# Altium PCB lp_ecg(1).PcbDoc
Units mm, origin at the board's own origin, x right, y up, seen from the top; angles counter-clockwise.
Board outline 32.2 x 20.48 mm, 2 copper layers (F.Cu, B.Cu); 60 components, 74 nets, 247 pads, 31 vias.
Unrouted connection lines stored in the file: 4.
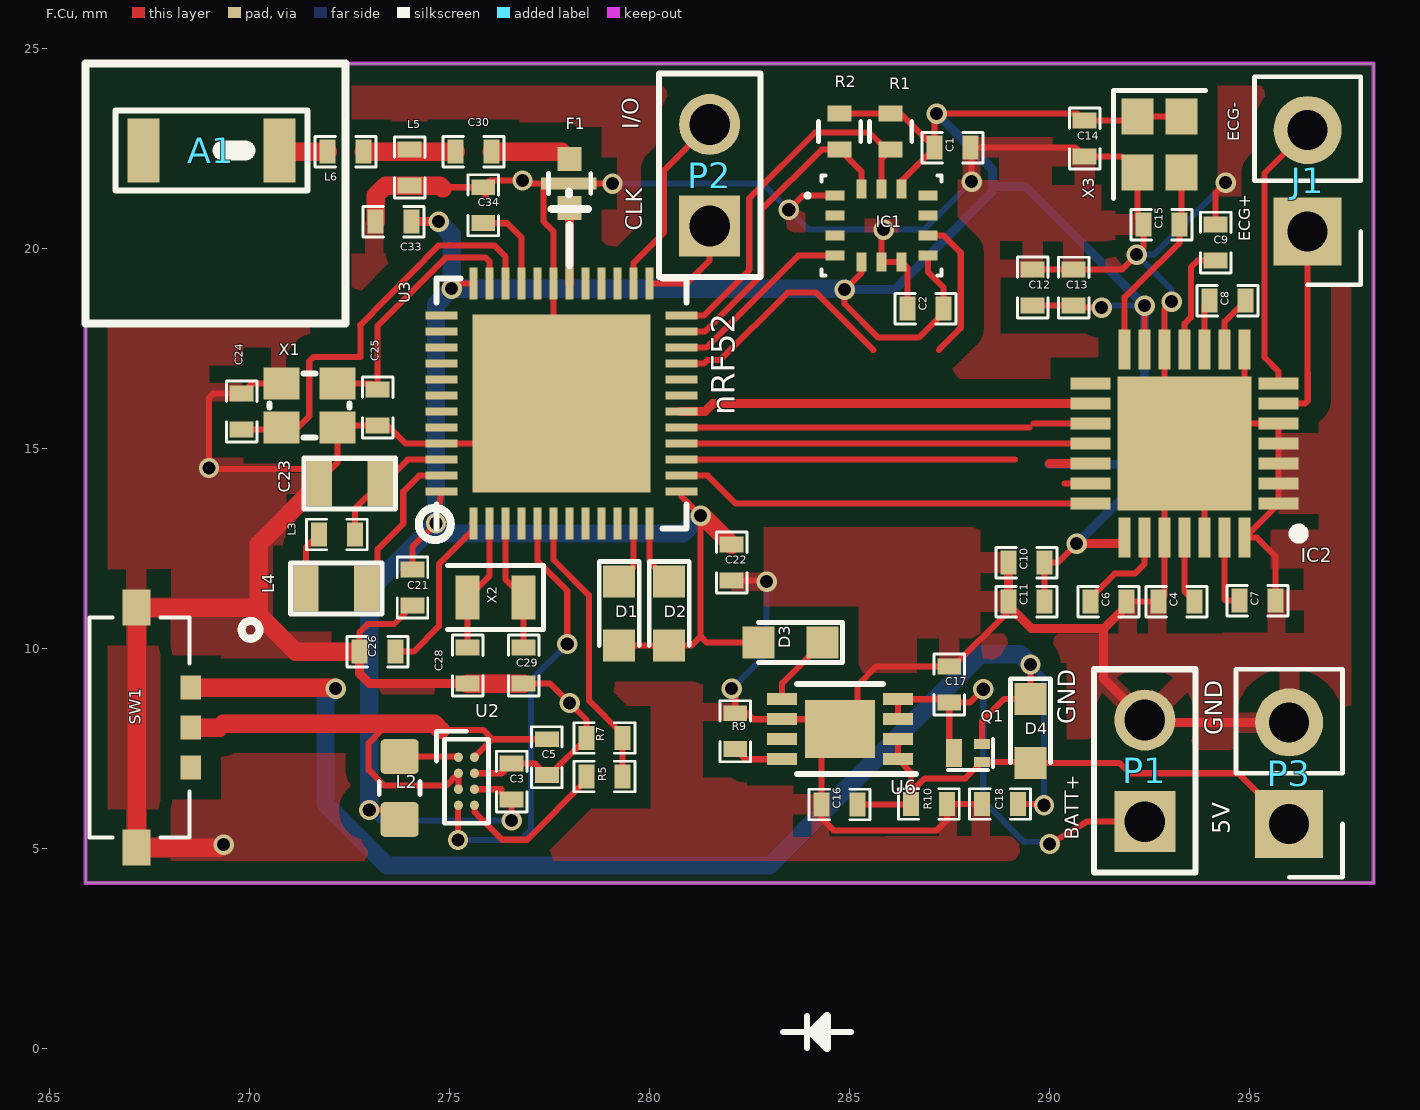
[diagram p0: F.Cu view]
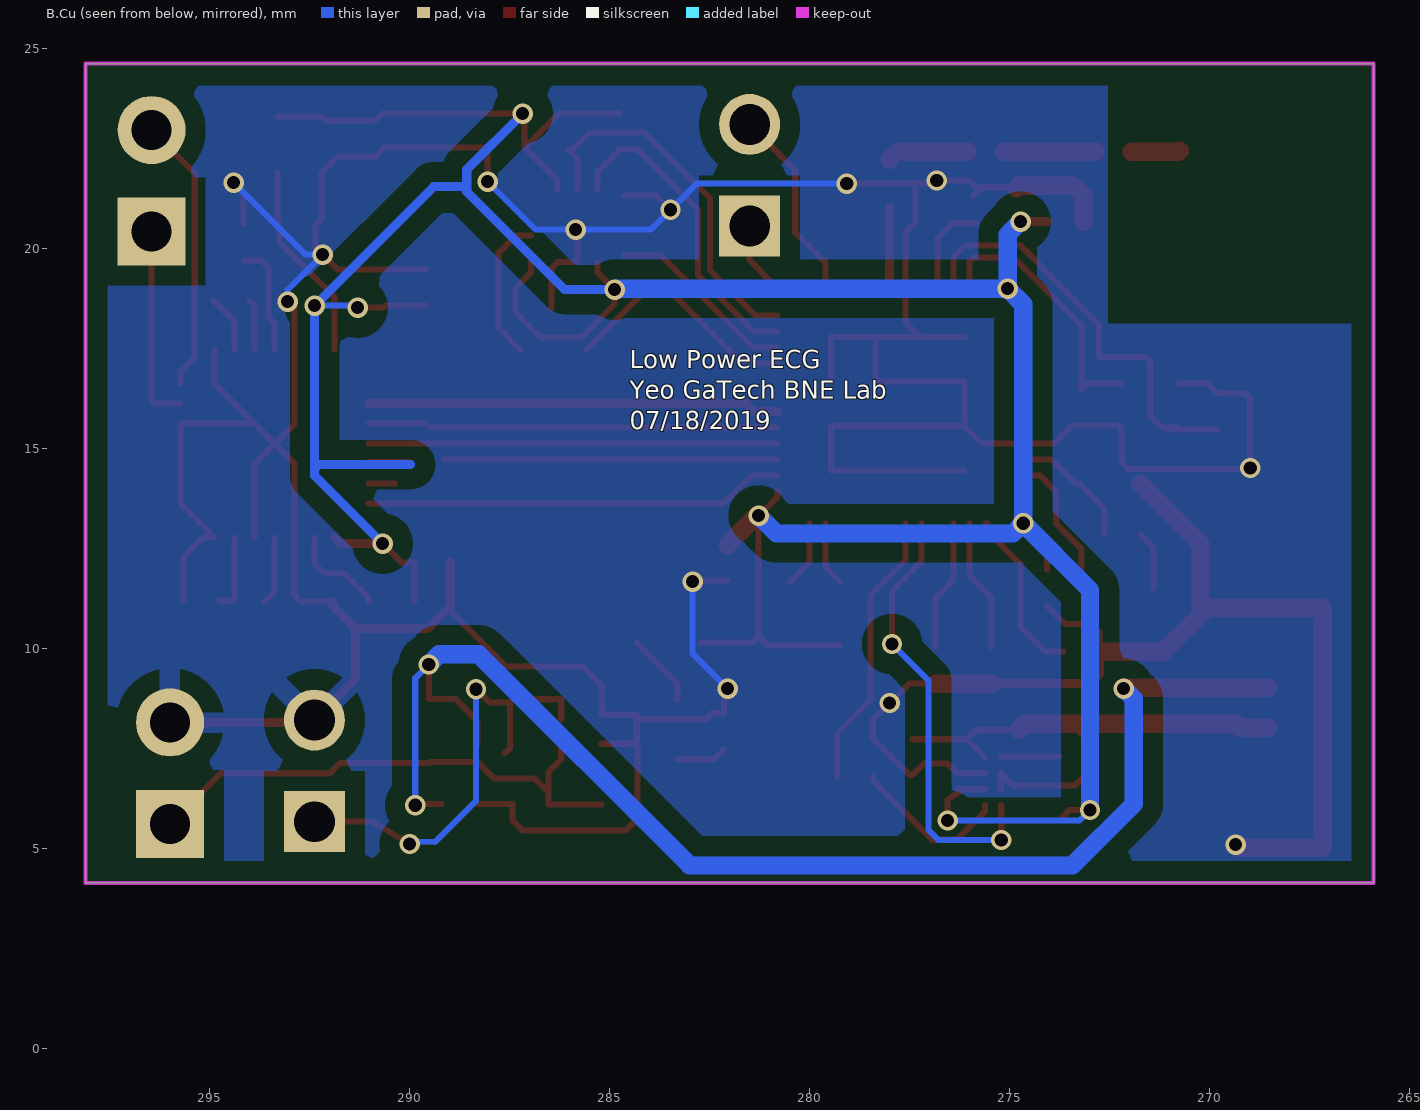
[diagram p1: B.Cu view, seen from below]

## Layer stack, top to bottom
F.Mask: solder mask 0.0102, Solder Resist, Dk 3.5
F.Cu: signal copper 0.0356
Dielectric 1: dielectric 0.32, FR-4, Dk 4.8
B.Cu: signal copper 0.0356
B.Mask: solder mask 0.0102, Solder Resist, Dk 3.5

## Board outline
265.9,4.132 298.1,4.132 298.1,24.612 265.9,24.612 265.9,24.592 265.9,4.132

## Design rules (kind name [scope] priority, off if disabled: settings)
Clearance "Clearence 0.508_Polygon" [InNamedPolygon('F.Cu-DGND') OR InNamedPolygon('B.Cu-DGND')] p1: gap=0.508 ignorepadtopadclearanceinfootprint=FALSE
Clearance "Clearence 0.1524_NetClass" [InNetClass('Default')] p2: gap=0.152 ignorepadtopadclearanceinfootprint=FALSE
HoleSize "Hole Size (Default)" [All] p1: absolutevalues=TRUE maxlimit=10 minlimit=0 maxpercent=80.000 minpercent=20.000
MinimumSolderMaskSliver [All] p1: minsoldermaskwidth=0
PolygonConnect Polygon_B.Cu-DGND_ConnectDirect [IsNamedPolygon('B.Cu-DGND') vs IsVia] p1: connectstyle=Direct reliefconductorwidth=0.254 reliefentries=4 polygonreliefangle="90 Angle" airgapwidth=0.254
PolygonConnect Polygon_B.Cu-DGND_ConnectRelief45 [IsNamedPolygon('B.Cu-DGND') vs (IsThruPin or IsSMTPin) and (PadShape_AllLayers = 'Round')] p2: connectstyle=Relief reliefconductorwidth=0.508 reliefentries=4 polygonreliefangle="45 Angle" airgapwidth=0.508
PolygonConnect Polygon_B.Cu-DGND_ConnectRelief90 [IsNamedPolygon('B.Cu-DGND') vs (IsThruPin or IsSMTPin) and (PadShape_AllLayers <> 'Round')] p3: connectstyle=Relief reliefconductorwidth=0.508 reliefentries=4 polygonreliefangle="90 Angle" airgapwidth=0.508
PolygonConnect Polygon_F.Cu-DGND_ConnectDirect [IsNamedPolygon('F.Cu-DGND') vs IsVia] p4: connectstyle=Direct reliefconductorwidth=0.254 reliefentries=4 polygonreliefangle="90 Angle" airgapwidth=0.254
PolygonConnect Polygon_F.Cu-DGND_ConnectRelief45 [IsNamedPolygon('F.Cu-DGND') vs (IsThruPin or IsSMTPin) and (PadShape_AllLayers = 'Round')] p5: connectstyle=Relief reliefconductorwidth=0.508 reliefentries=4 polygonreliefangle="45 Angle" airgapwidth=0.508
PolygonConnect Polygon_F.Cu-DGND_ConnectRelief90 [IsNamedPolygon('F.Cu-DGND') vs (IsThruPin or IsSMTPin) and (PadShape_AllLayers <> 'Round')] p6: connectstyle=Relief reliefconductorwidth=0.508 reliefentries=4 polygonreliefangle="90 Angle" airgapwidth=0.508
RoutingVias [All] p1: holewidth=0.711 width=1.27 viastyle="Through Hole" minholewidth=0.711 minwidth=1.27 maxholewidth=0.711 maxwidth=1.27
SilkToSilkClearance [All] p1: silktosilkclearance=0
SilkToSolderMaskClearance [IsPad] p1: minsilkscreentomaskgap=0 clearancetoexposedcopper=TRUE
SolderMaskExpansion [All] p1: expansion=0.102 istentingtop=FALSE
Width [All] p1: maxlimit=10 minlimit=0.05 preferedwidth=0.457 minimp=50.000000 maximp=50.000000 favimp=50.000000
26 further rules are at their usual default settings.

## Classes and differential pairs
net class Default: 1.8V 5V_in_charge AIN_BAT_DIV_VOLTAGE BATT_IN BMI_INT1 BMI_INT2 BMI_SCL BMI_SDA DEC1 DEC2 DEC3 DGND LED2 LED3 LOAD_SW_CTRL MAX30003_CSB MAX30003_FCLK MAX30003_INT MAX30003_INT2 MAX30003_SCLK MAX30003_SDI MAX30003_SDO Net-(A1-Pad1) Net-(A1-Pad2) Net-(C4-Pad2) Net-(C6-Pad1) Net-(C7-Pad1) Net-(C8-Pad1) Net-(C8-Pad2) Net-(C9-Pad1) Net-(C23-Pad1) Net-(C24-Pad2) Net-(C25-Pad2) Net-(C28-Pad1) Net-(C29-Pad1) Net-(C30-Pad2) Net-(D3-Pad1) Net-(F1-Pad2) Net-(IC1-Pad2) Net-(IC1-Pad3) Net-(IC1-Pad10) Net-(IC1-Pad11) Net-(IC2-Pad6) Net-(IC2-Pad7) Net-(L2-Pad1) Net-(L3-Pad1) Net-(L4-Pad1) Net-(R5-Pad1) Net-(R9-Pad1) Net-(SW1-Pad2) Net-(U3-Pad4) Net-(U3-Pad7) Net-(U3-Pad8) Net-(U3-Pad9) Net-(U3-Pad10) Net-(U3-Pad20) Net-(U3-Pad27) Net-(U3-Pad28) Net-(U3-Pad29) Net-(U3-Pad37) Net-(U3-Pad38) Net-(U3-Pad39) Net-(U3-Pad40) Net-(U3-Pad41) Net-(U3-Pad42) Net-(U3-Pad43) Net-(U3-Pad44) Net-(U6-Pad7) RF SWDCLK SWDIO VCC VccSwitch

## Components (designator, comment, footprint, x,y, rotation, side; value= is the part's Value field where it differs from the comment)
A1 "CHIP-ANT" JTI-2450AT18A100-CHIP-ANT 269.045,22.439 r180 top
C1 "100nF" SM0402 287.575,22.513 r0 top
C2 "100nF" SM0402 286.9,18.487 r180 top
C3 "10uF" SM0402 276.55,6.662 r90 top
C4 "10uF" SM0402 293.175,11.162 r0 top
C5 "10uF" SM0402 277.43,7.273 r270 top
C6 "10uF" SM0402 291.475,11.162 r0 top
C7 "1uF" SM0402 295.2,11.187 r0 top
C8 "1uF" SM0402 294.45,18.687 r0 top
C9 "1uF" SM0402 294.15,20.137 r90 top
C10 "0.1uF" SM0402 289.425,12.138 r0 top
C11 "10uF" SM0402 289.425,11.162 r180 top
C12 "0.1uF" SM0402 289.575,19.013 r90 top
C13 "10uF" SM0402 290.6,19.012 r270 top
C14 "0.1uF" SM0402 290.875,22.738 r270 top
C15 "15pF" SM0402 292.8,20.588 r180 top
C16 "4.7uF" SM0402 284.75,6.092 r180 top
C17 "4.7uF" SM0402 287.49,9.092 r90 top
C18 "1.0uF" SM0402 288.76,6.102 r0 top
C21 "4.7µF" SM0402 274.07,11.512 r90 top
C22 "100nF" SM0402 282.05,12.137 r270 top
C23 "1.0µF" SM0603 272.5,14.112 r180 top
C24 "12pF" SM0402 269.8,15.912 r270 top
C25 "12pF" SM0402 273.2,16.012 r90 top
C26 "100nF" SM0402 273.2,9.912 r180 top
C28 "12pF" SM0402 275.45,9.562 r270 top
C29 "12pF" SM0402 276.85,9.562 r270 top
C30 "1.0pF" SM0402 275.6,22.412 r180 top
C33 "100nF" SM0402 273.6,20.662 r0 top
C34 "100pF" SM0402 275.84,21.072 r90 top
D1 "Comment" LED_0603 279.24,10.862 r270 top
D2 "Comment" LED_0603 280.49,10.862 r270 top
D3 "Comment" LED_0603 283.525,10.137 r180 top
D4 "Comment" LED_0603 289.52,7.932 r270 top
F1 "Comment" R_0402#1 278,21.612 r90 top
IC1 "BMI160" BMI160 285.8,20.562 r0 top
IC2 "MAX30003CTI+" QFN50P500X500X80-29N 293.375,15.112 r180 top
J1 "Comment" Pin_Header_Straight_1x02_Pitch2.54mm 296.45,20.412 r180 top
L2 "Comment" L_0603_1608Metric 273.75,6.502 r270 top
L3 "15nH" SM0402 272.18,12.842 r0 top
L4 "10uH" SM0603 272.17,11.492 r180 top
L5 "2.7nH" SM0402 274,22.012 r270 top
L6 "3.9nH" SM0402 272.4,22.412 r180 top
P1 "CONN_2" PIN_ARRAY_2X1 292.38,6.932 r90 top
P2 "CONN_2" PIN_ARRAY_2X1 281.5,21.822 r90 top
P3 "Comment" Pin_Header_Straight_1x02_Pitch2.54mm 295.99,5.602 r180 top
Q1 "Comment" X2-DFN1006 287.96,7.382 r180 top
R1 "Comment" R_0402#2 286.025,22.912 r270 top
R2 "Comment" R_0402#2 284.75,22.912 r270 top
R5 "1M" SM0402 278.87,6.792 r0 top
R7 "1M" SM0402 278.87,7.752 r0 top
R9 "2k" SM0402 282.14,7.922 r90 top
R10 "100k" SM0402 286.98,6.102 r0 top
SW1 "SSAJ120100" SSAJ120100 268.53,9.012 r270 top
U2 "Comment" Texas_DSBGA-8_0.9x1.9mm_Layout2x4_P0.5mm 275.42,6.672 r0 top
U3 "Comment" UQFN-48-1EP_6x6mm_Pitch0.4mm 277.8,16.112 r90 top
U6 "Comment" DFN-8-1EP_3x2mm_Pitch0.5mm 284.76,7.972 r180 top
X1 "Crystal_GND24" CRYSTAL-SMD-2.0MMx1.6MM 271.5,16.062 r0 top
X2 "Comment" Crystal_SMD_2012-2pin_2.0x1.2mm 276.15,11.262 r180 top
X3 "Comment" Crystal_SMD_2016-4pin_2.0x1.6mm 292.75,22.587 r270 top

## Footprints (in the part's own frame and the unit in brackets; to place one, negate y for a bottom-side part, rotate by r counter-clockwise, add the part's x,y. Pads: shape width x height; smd on the part's side, far side on the other; paste and mask are expansions set on the pad)
BMI160 [mm]
  rect 0.475x0.25 smd mask+0.015: 1(-1.162,0.75) 2(-1.162,0.25) 3(-1.162,-0.25) 4(-1.162,-0.75) 8(1.162,-0.75) 9(1.162,-0.25) 10(1.162,0.25) 11(1.162,0.75)
  rect 0.25x0.475 smd mask+0.015: 5(-0.5,-0.912) 6(0,-0.912) 7(0.5,-0.912) 12(0.5,0.912) 13(0,0.912) 14(-0.5,0.912)
  silkscreen extent -1.9,-1.25 1.5,1.25
CRYSTAL-SMD-2.0MMx1.6MM [mm]
  rect 0.9x0.8 smd mask+0.015: 1(-0.7,-0.55) 2(0.7,-0.55) 3(0.7,0.55) 4(-0.7,0.55)
  silkscreen extent -1,-0.8 1,0.8
Crystal_SMD_2012-2pin_2.0x1.2mm [mm]
  rect 0.6x1.1 smd mask+0.015: 1(-0.7,0) 2(0.7,0)
  silkscreen extent -1.2,-0.8 1.2,0.8
Crystal_SMD_2016-4pin_2.0x1.6mm [mm]
  rect 0.9x0.8 smd mask+0.015: 1(-0.7,-0.55) 2(0.7,-0.55) 3(0.7,0.55) 4(-0.7,0.55)
  silkscreen extent -1.35,-1.15 1.35,1.15
DFN-8-1EP_3x2mm_Pitch0.5mm [mm]
  rect 0.75x0.3 smd mask+0.015: 1(-1.45,0.75) 2(-1.45,0.25) 3(-1.45,-0.25) 4(-1.45,-0.75) 5(1.45,-0.75) 6(1.45,-0.25) 7(1.45,0.25) 8(1.45,0.75)
  rect 0.875x0.725 smd mask+0.015: 9(-0.437,-0.363) 9(-0.437,0.363) 9(0.437,-0.363) 9(0.437,0.363)
  silkscreen extent -1.9,-1.12 1.07,1.12
JTI-2450AT18A100-CHIP-ANT [mm]
  rect 0.8x1.6 smd mask+0.015: 1(-1.7,0) 2(1.7,0)
  silkscreen extent -2.4,-1 2.4,1
L_0603_1608Metric [mm]
  rrect25% 0.875x0.95 smd mask+0.015: 1(-0.787,0) 2(0.787,0)
  silkscreen extent -0.16,-0.51 0.16,0.51
LED_0603 [mm]
  rect 0.8x0.8 smd mask+0.015: 1(-0.8,0) 2(0.8,0)
  silkscreen extent -1.3,-0.5 0.8,0.5
PIN_ARRAY_2X1 [mil]
  rect 60x60 hole 40 paste-60 mask+0.59: 1(-50,0)
  round 60 hole 40 paste-60 mask+0.59: 2(50,0)
  silkscreen extent -100,-50 100,50
Pin_Header_Straight_1x02_Pitch2.54mm [mm]
  rect 1.7x1.7 hole 1 paste-1.7 mask+0.015: 1(0,0)
  rrect100% 1.7x1.7 hole 1 paste-1.7 mask+0.015: 2(0,-2.54)
  silkscreen extent -1.33,-3.87 1.33,1.33
QFN50P500X500X80-29N [mm]
  rect 1x0.3 smd mask+0.015: 1(-2.35,1.5) 2(-2.35,1) 3(-2.35,0.5) 4(-2.35,0) 5(-2.35,-0.5) 6(-2.35,-1) 7(-2.35,-1.5) 15(2.35,-1.5) 16(2.35,-1) 17(2.35,-0.5) 18(2.35,0) 19(2.35,0.5) 20(2.35,1) 21(2.35,1.5)
  rect 0.3x1 smd mask+0.015: 8(-1.5,-2.35) 9(-1,-2.35) 10(-0.5,-2.35) 11(0,-2.35) 12(0.5,-2.35) 13(1,-2.35) 14(1.5,-2.35) 22(1.5,2.35) 23(1,2.35) 24(0.5,2.35) 25(0,2.35) 26(-0.5,2.35) 27(-1,2.35) 28(-1.5,2.35)
  rect 3.35x3.35 smd mask+0.015: 29(0,0)
  silkscreen extent -2.98,2.13 -2.73,2.37
R_0402#1 [mm]
  rect 0.3x0.7 smd mask+0.015: 1(0,-0.326) 3(0,0.363)
  rect 0.6x0.6 smd mask+0.015: 2(-0.613,0) 4(0.613,0)
  silkscreen extent -0.25,-0.53 0.25,0.53
R_0402#2 [mm]
  rect 0.4x0.6 smd mask+0.015: 1(-0.45,0) 2(0.45,0)
  silkscreen extent -0.25,-0.53 0.25,0.53
SM0402 [mm]
  rect 0.399x0.599 smd mask+0.015: 1(-0.45,0) 2(0.45,0)
  silkscreen extent -0.76,-0.38 0.76,0.38
SM0603 [mil]
  rect 25x45 smd mask+0.59: 1(-30,0) 2(30,0)
  silkscreen extent -45,-25 45,25
SSAJ120100 [mm]
  rect 0.6x0.51 smd mask+0.015: 1(0,0) 2(2,0) 3(1,0)
  rect 0.9x0.7 smd mask+0.015: 4(-2,-1.355) 5(4,-1.355)
  silkscreen extent -1.75,-2.53 3.75,-0.04
Texas_DSBGA-8_0.9x1.9mm_Layout2x4_P0.5mm [mm]
  round 0.23 smd paste-0.23 mask+0.05: A1(-0.2,0.6) A2(0.2,0.6) B1(-0.2,0.2) B2(0.2,0.2) C1(-0.2,-0.2) C2(0.2,-0.2) D1(-0.2,-0.6) D2(0.2,-0.6)
  silkscreen extent -0.75,-1.05 0.55,1.25
UQFN-48-1EP_6x6mm_Pitch0.4mm [mm]
  rect 0.8x0.2 smd mask+0.015: 1(-3,2.2) 2(-3,1.8) 3(-3,1.4) 4(-3,1) 5(-3,0.6) 6(-3,0.2) 7(-3,-0.2) 8(-3,-0.6) 9(-3,-1) 10(-3,-1.4) 11(-3,-1.8) 12(-3,-2.2) 25(3,-2.2) 26(3,-1.8) 27(3,-1.4) 28(3,-1) 29(3,-0.6) 30(3,-0.2) 31(3,0.2) 32(3,0.6) 33(3,1) 34(3,1.4) 35(3,1.8) 36(3,2.2)
  rect 0.2x0.8 smd mask+0.015: 13(-2.2,-3) 14(-1.8,-3) 15(-1.4,-3) 16(-1,-3) 17(-0.6,-3) 18(-0.2,-3) 19(0.2,-3) 20(0.6,-3) 21(1,-3) 22(1.4,-3) 23(1.8,-3) 24(2.2,-3) 37(2.2,3) 38(1.8,3) 39(1.4,3) 40(1,3) 41(0.6,3) 42(0.2,3) 43(-0.2,3) 44(-0.6,3) 45(-1,3) 46(-1.4,3) 47(-1.8,3) 48(-2.2,3)
  rect 1.112x1.112 smd mask+0.015: 49(-1.669,-1.669) 49(-1.669,-0.556) 49(-1.669,0.556) 49(-1.669,1.669) 49(-0.556,1.669) 49(-0.556,-0.556) 49(-0.556,0.556) 49(-0.556,-1.669) 49(0.556,1.669) 49(0.556,-0.556) 49(0.556,0.556) 49(0.556,-1.669) 49(1.669,-1.669) 49(1.669,-0.556) 49(1.669,0.556) 49(1.669,1.669)
  silkscreen extent -3.13,-3.13 3.13,3.13
X2-DFN1006 [mm]
  rect 0.4x0.25 smd mask+0.015: 1(-0.35,0.225) 3(-0.35,-0.225)
  rect 0.4x0.7 smd mask+0.015: 2(0.35,0)
  silkscreen extent -0.63,-0.35 0.5,0.43

## Part data
A1: library part JTI-2450AT18A100-CHIP-ANT
C1 C2 C3 C4 C5 C6 C7 C8 C9 C10 C11 C12 C13 C14 C15 C16 C17 C18 C21 C22 C24 C25 C26 C28 C29 C30 C33 C34 L3 L5 L6 R5 R7 R9 R10: library part SM0402
C23 L4: library part SM0603
D1 D2 D3 D4: library part LED_0603, "LED 0603 smd package"
F1 R1 R2: library part R_0402, "Resistor SMD 0402, reflow soldering, Vishay (see dcrcw.pdf)"
IC1: "BMI160-5"
IC2: library part QFN50P500X500X80-29N, "21-0140 AH"
J1 P3: library part Pin_Header_Straight_1x02_Pitch2.54mm, "Through hole straight pin header, 1x02, 2.54mm pitch, single row"
L2: library part L_0603_1608Metric, "Inductor SMD 0603 (1608 Metric), square (rectangular) end terminal, IPC_7351 nominal, (Body size source: http://www.tortai-tech.com/upload/download/2011102023233369053.pdf), generated with kicad-footprint-generator"
P1 P2: library part PIN_ARRAY_2X1, "Connecteurs 2 pins"
Q1: library part X2-DFN1006
U2: library part Texas_DSBGA-8_0.9x1.9mm_Layout2x4_P0.5mm, "Texas Instruments, DSBGA, 0.9x1.9mm, 8 bump 2x4 (perimeter) array, NSMD pad definition (http://www.ti.com/lit/ds/symlink/txb0102.pdf, http://www.ti.com/lit/an/snva009ag/snva009ag.pdf)"
U3: library part UQFN-48-1EP_6x6mm_Pitch0.4mm, "48-Lead Plastic Ultra Thin Quad Flat, No Lead Package (MV) - 6x6x0.5 mm Body [UQFN]; (see Microchip Packaging Specification 00000049BS.pdf)"
U6: library part DFN-8-1EP_3x2mm_Pitch0.5mm, "8-Lead Plastic Dual Flat, No Lead Package (MC) - 2x3x0.9 mm Body [DFN] (see Microchip Packaging Specification 00000049BS.pdf)"
X1: library part CRYSTAL-SMD-2.0MMx1.6MM
X2: library part Crystal_SMD_2012-2pin_2.0x1.2mm, "SMD Crystal 2012/2 http://txccrystal.com/images/pdf/9ht11.pdf, 2.0x1.2mm^2 package"
X3: library part Crystal_SMD_2016-4pin_2.0x1.6mm, "SMD Crystal SERIES SMD2016/4 http://www.q-crystal.com/upload/5/2015552223166229.pdf, 2.0x1.6mm^2 package"

## Via types
v1: diameter 0.508, hole 0.33, F.Cu to B.Cu, tented both sides, 31 vias

## Nets (pads, with @x,y where several pads share a name; then routed paths per layer and width w, separated by ;. In a path a pad name is that pad's centre, name@x,y a point inside that pad or via, vN(x,y) a via of type N, cw(c..) or ccw(c..) an arc to the next point about the centre after c; other vN are vias at no path point)
1.8V: C1.1 C2.1 C3.1 C10.2 C11.1 C12.1 C13.2 C14.1 C21.2 C22.1 C33.2 D1.2 D2.2 D3.2 IC1.5 IC1.8 IC1.12 IC2.13 IC2.19 IC2.22 L2.2 R1.1 R2.1 U2.C2 U3.13 U3.36 U3.48 X3.1 X3.4 | length 97.8
  F.Cu w0.152: v1(272.99,5.952) 273.513,5.952 L2.2 ; C33.2 v1@274.58,20.662 ; C21.2 274.07,12.532 274.64,13.102 v1(274.66,13.122) U3.48 ; v1(275.05,18.987) 275.175,19.112 U3.36 ; U2.C2 276.29,6.472 276.286,6.39 C3.1 v1(276.55,5.692) ; D1.2 D2.2 281.042,10.062 281.275,10.295 ; U3.13 280.8,13.787 v1(281.275,13.312) 281.275,10.295 ; D3.2 281.433,10.137 281.275,10.295 ; R2.1 R1.1 286.275,23.362 C1.1 ; IC1.5 285.3,19.387 v1(284.875,18.962) 284.875,18.603 285.716,17.762 286.725,17.762 287.35,18.387 C2.1 287.35,19.013 286.962,19.4 IC1.8 ; IC1.12 286.3,21.687 C1.1 ; C12.1 C13.2 290.65,18.512 v1(291.3,18.512) ; C11.1 C10.2 290.2,12.138 v1(290.675,12.612) ; IC2.13 v1(292.375,18.562) ; X3.4 X3.1 292.1,23.187 C14.1 290.7,23.362 v1(287.175,23.362) 287.125,23.313 C1.1
  F.Cu w0.229: C33.2 v1(274.725,20.662) ; 290,14.612 IC2.19 ; v1(290.675,12.612) 291.725,12.612 IC2.22
  F.Cu w0.457: v1(281.275,13.312) 281.325,13.312 281.675,12.962 C22.1
  B.Cu w0.152: v1(272.99,5.952) 273.25,5.692 v1(276.55,5.692) ; v1(291.3,18.512) 291.35,18.562 v1(292.375,18.562)
  B.Cu w0.229: v1(284.875,18.962) 285.234,18.962 286.121,18.962 288.571,21.412 288.571,21.537 ; v1(287.175,23.362) 288.571,21.967 288.571,21.537 ; 289.975,14.587 292.275,14.587 292.375,14.487 ; v1(290.675,12.612) 292.375,14.312 292.375,14.487 ; 288.571,21.537 289.4,21.537 v1(292.375,18.562) 292.375,14.487
  B.Cu w0.457: v1(272.99,5.952) 272.99,11.452 v1(274.66,13.122) ; v1(274.725,20.662) 275.05,20.337 v1(275.05,18.987) ; v1(281.275,13.312) 281.021,13.059 280.831,12.869 274.914,12.869 v1(274.66,13.122) ; v1(284.875,18.962) 284.85,18.987 v1(275.05,18.987) ; v1(274.66,13.122) 274.66,18.597 v1(275.05,18.987)
5V_in_charge: C16.1 D4.2 P3.1 Q1.1 R10.1 U6.1 U6.2 | length 13.8
  F.Cu w0.152: C16.1 286.52,6.092 R10.1 ; U6.2 U6.1 286.53,6.902 R10.1 ; P3.1 294.72,6.872 292,6.872 291.74,7.132 D4.2 289.495,7.157 Q1.1 287.895,6.742 286.88,6.742 286.53,6.393 R10.1
AIN_BAT_DIV_VOLTAGE: R5.2 R7.2 U3.6 | length 7
  F.Cu w0.152: U3.6 277.6,12.204 278.48,11.324 278.48,8.692 279.32,7.853 R7.2 R5.2
BATT_IN: C17.1 P1.1 Q1.2 U6.3 U6.4 | length 11.5
  F.Cu w0.152: U6.3 U6.4 287.41,8.722 C17.1 ; Q1.2 287.49,7.502 C17.1 ; v1(288.34,8.972) 288.01,8.643 C17.1 ; v1(290,5.102) 290.93,5.662 P1.1
  B.Cu w0.152: v1(288.34,8.972) 288.34,6.182 289.37,5.152 289.94,5.162 v1(290,5.102)
BMI_INT1: IC1.4 U3.22 | length 4.8
  F.Cu w0.152: U3.22 281.352,17.512 281.413,17.512 283.713,19.812 IC1.4
BMI_INT2: IC1.9 U3.21 | length 9.8
  F.Cu w0.152: U3.21 281.352,17.112 281.448,17.208 281.771,17.208 283.45,18.887 284.16,18.887 285.59,17.458 ; IC1.9 287.352,20.312 287.777,19.887 287.777,18.005 287.23,17.458
BMI_SCL: IC1.13 R1.2 U3.24 | length 9.7
  F.Cu w0.152: U3.24 281.352,18.312 282.49,19.451 282.49,21.242 284.139,22.891 285.497,22.891 285.925,22.462 R1.2 285.8,22.237 IC1.13 ; U3.24@280.95,18.312 280.9,18.312 U3.24@281.1,18.312
BMI_SDA: IC1.14 R2.2 U3.23 | length 8
  F.Cu w0.152: U3.23 281.352,17.912 281.383,17.912 282.795,19.325 282.795,20.959 284.298,22.462 R2.2 285.3,21.912 IC1.14
DEC1: C26.1 U3.1 | length 4.3
  F.Cu w0.152: C26.1 274.1,9.912 274.73,10.542 274.73,12.102 275.6,12.972 U3.1 U3.1@275.55,13.112
DEC2: U3.32
DEC3: C34.1 U3.33 | length 2.3
  F.Cu w0.152: C34.1 276.44,20.623 276.8,20.262 U3.33
DGND: C1.2 C2.2 C3.2 C4.1 C5.2 C6.2 C7.2 C9.2 C10.1 C11.2 C12.2 C13.1 C14.2 C15.2 C16.2 C17.2 C18.1 C21.1 C22.2 C23.2 C24.1 C25.1 C26.2 C28.2 C29.2 C33.1 C34.2 F1.1 F1.3 IC1.1 IC1.6 IC1.7 IC2.1 IC2.2 IC2.3 IC2.4 IC2.5 IC2.8 IC2.12 IC2.24 IC2.26 IC2.28 IC2.29 L5.2 P1.2 P3.2 R7.1 R9.2 R10.2 SW1.4 SW1.5 U2.B2 U3.31 U3.45 U3.49 U6.6 U6.9 X1.2 X1.4 X3.2 | length 155.6
  F.Cu w0.152: X1.4 270.05,16.612 C24.1 269.094,16.362 268.986,16.254 v1(268.986,14.502) 268.986,14.476 272.034,14.476 272.2,14.642 272.2,15.462 X1.2@272.3,15.563 ; X1.2 272.25,15.563 C25.1 273.45,15.563 273.9,15.112 U3.45 275.688,15.112 U3.49@276.131,15.556 ; C26.2@272.75,9.737 C26.2 272.75,10.403 272.95,10.602 273.61,10.602 C21.1 ; 274.76,21.563 274.801,21.522 C34.2 276.01,21.692 v1(276.82,21.692) 276.9,21.612 F1.3 F1.1 v1(279.07,21.612) ; U2.B2 276.311,6.872 C3.2 277.142,7.112 C5.2 277.492,6.823 R7.1 278.421,8.204 278.421,8.206 v1(278,8.626) 277.514,9.113 C29.2 ; C34.2@275.73,21.492 275.91,21.312 ; U3.49@276.131,14.444 277.244,14.444 278.356,14.444 279.469,14.444 279.469,15.556 278.356,15.556 277.244,15.556 U3.49@276.131,15.556 ; U3.49@276.131,17.781 U3.49@277.244,17.781 ; F1.3@277.35,21.612 277.35,20.662 277.6,20.412 U3.31 277.6,18.137 U3.49@277.244,17.781 ; U3.49@279.469,16.669 279.469,17.781 U3.49@278.356,17.781 ; v1(282.05,8.987) 282.14,8.897 R9.2 282.44,8.372 282.59,8.222 U6.6 284.21,8.222 U6.9@284.322,8.335 ; C22.2 282.9,11.688 v1(282.925,11.662) ; v1(283.478,20.96) 283.83,21.312 IC1.1 IC1.1@284.575,21.312 ; U6.9@285.197,7.61 U6.9@284.322,7.61 ; v1(285.85,20.462) 285.8,20.412 IC1.6 IC1.7 286.45,19.5 C2.2 ; v1(288.05,21.662) 288.05,22.487 C1.2 290.651,22.513 C14.2 291.799,22.288 X3.2 292.2,20.738 C15.2 292.35,20.013 v1(292.175,19.837) 291.799,19.462 C13.1 ; C18.1 R10.2 287.43,5.692 287.18,5.442 284.6,5.442 284.3,5.742 C16.2 284.3,7.588 U6.9@284.322,7.61 ; C11.2 288.975,10.927 287.59,9.542 C17.2 285.67,9.542 285.197,9.07 285.197,8.335 U6.9@284.322,8.335 ; C12.2 C13.1 ; C6.2 C4.1 292.875,11.312 IC2.24 292.875,14.612 IC2.29 ; v1(293.05,18.662) 292.875,18.487 IC2.12 292.875,15.612 IC2.29 ; IC2.26 293.875,14.612 IC2.29 ; C9.2 294.15,21.387 v1(294.4,21.637) ; IC2.8 294.875,16.612 IC2.29 ; C7.2 295.65,11.639 295.65,12.29 295.177,12.762 IC2.28 IC2.1 IC2.2 IC2.3 IC2.4 IC2.5 293.875,15.612 IC2.29 ; U3.49@276.131,15.556 276.131,16.669 277.244,16.669 278.356,16.669 U3.49@278.356,17.781 ; U3.49@277.244,17.781 U3.49@278.356,17.781 ; U6.9@284.322,7.61 U6.9@284.322,8.335
  F.Cu w0.229: C26.2 272.75,9.362 273,9.113 C28.2 ; C10.1 C11.2 288.975,11.062 289.55,10.487 291.35,10.487 ; C6.2 291.925,11.062 291.35,10.487 ; P3.2 292.44,8.142 P1.2 291.35,9.233 291.35,10.487
  F.Cu w0.457: v1(269.35,5.087) 269.275,5.012 SW1.5 267.175,5.92 SW1.4 270.05,11.012 270.23,10.832 ; C23.2 270.23,12.604 270.23,10.832 ; C26.2 271.15,9.912 270.23,10.832 ; C33.1 273.15,21.313 273.4,21.563 L5.2 274.76,21.563 274.83,21.492 ; C28.2 276.1,9.113 C29.2
  B.Cu w0.152: v1(268.986,14.502) v1@268.99,14.502 ; v1@276.8,21.682 276.81,21.682 v1(276.82,21.692) ; v1@279.04,21.612 v1(279.07,21.612) 282.825,21.612 v1(283.478,20.96) 283.975,20.462 v1(285.85,20.462) 286.85,20.462 v1(288.05,21.662) ; v1(282.05,8.987) 282.925,9.862 v1(282.925,11.662) ; v1(293.05,18.662) 293.05,18.962 v1(292.175,19.837) 292.6,19.837 v1(294.4,21.637)
LED2: D1.1 U3.11 | length 1.6
  F.Cu w0.152: D1.1 279.6,12.022 U3.11
LED3: D2.1 U3.12 | length 1.7
  F.Cu w0.152: U3.12 280,12.152 D2.1
LOAD_SW_CTRL: U2.D1 U3.5 | length 11.1
  F.Cu w0.152: v1(275.21,5.202) 275.21,6.062 U2.D1 ; U3.5 277.2,12.174 277.94,11.434 277.94,10.462 v1(277.94,10.102)
  B.Cu w0.152: v1(275.21,5.202) 276.774,5.202 277.032,5.461 277.032,9.195 v1(277.94,10.102)
MAX30003_CSB: IC2.15 U3.19
MAX30003_FCLK: C15.1 IC2.14 X3.3 | length 5
  F.Cu w0.152: IC2.14 291.875,18.776 292.711,19.612 292.726,19.612 293.25,20.136 C15.1 293.3,20.638 X3.3
MAX30003_INT: IC2.21 U3.14 | length 10.5
  F.Cu w0.152: U3.14 281.352,14.312 281.454,14.312 282.154,13.613 IC2.21
MAX30003_INT2: IC2.20 U3.15 | length 9
  F.Cu w0.152: U3.15 289.136,14.712 ; 290.373,14.112 IC2.20
MAX30003_SCLK: IC2.16 U3.18 | length 10.3
  F.Cu w0.229: U3.18 281.38,15.912 281.58,16.112 IC2.16
MAX30003_SDI: IC2.17 U3.17 | length 10.1
  F.Cu w0.152: U3.17 289.5,15.512 ; 289.6,15.612 IC2.17
MAX30003_SDO: IC2.18 U3.16 | length 10.2
  F.Cu w0.152: U3.16 IC2.18
Net-(A1-Pad1): A1.1 L6.2 | length 1.2
  F.Cu w0.46: A1.1 270.772,22.412 L6.2
Net-(A1-Pad2): A1.2
Net-(C4-Pad2): C4.2 IC2.25 | length 1.7
  F.Cu w0.152: IC2.25 293.375,11.412 C4.2
Net-(C6-Pad1): C6.1 IC2.23 | length 2.5
  F.Cu w0.152: C6.1 291.025,11.263 291.625,11.862 292.127,11.862 292.375,12.11 IC2.23
Net-(C7-Pad1): C7.1 IC2.27 | length 1.9
  F.Cu w0.152: IC2.27 294.375,11.212 294.399,11.187 C7.1
Net-(C8-Pad1): C8.1 IC2.10 | length 1.3
  F.Cu w0.152: IC2.10 293.875,18.562 C8.1
Net-(C8-Pad2): C8.2 IC2.9 | length 1.4
  F.Cu w0.152: IC2.9 294.375,18.163 C8.2
Net-(C9-Pad1): C9.1 IC2.11 | length 2.8
  F.Cu w0.152: IC2.11 293.375,18.114 293.532,18.272 293.532,19.522 293.698,19.687 C9.1
Net-(C23-Pad1): C23.1 L3.2 U3.46 | length 3.3
  F.Cu w0.152: L3.2 272.63,13.48 C23.1 273.35,14.112 273.95,14.712 U3.46
Net-(C24-Pad2): C24.2 U3.34 X1.1 | length 11
  F.Cu w0.152: C24.2 270.75,15.463 X1.1 ; X1.1@270.8,15.462 X1.1@271.05,15.462 ; X1.1@270.95,15.512 X1.1 ; U3.34 276.4,19.782 276.115,20.067 275.396,20.067 275,20.072 274.72,20.063 272.76,18.072 272.77,18.082 272.77,17.282 271.6,17.282 271.49,17.172 271.49,15.802 271.2,15.512 X1.1
Net-(C25-Pad2): C25.2 U3.35 X1.3 | length 6.8
  F.Cu w0.152: X1.3 273.05,16.612 C25.2 273.2,18.062 274.9,19.762 275.9,19.762 276,19.662 U3.35
Net-(C28-Pad1): C28.1 U3.2 X2.2 | length 3.3
  F.Cu w0.152: C28.1 X2.2 276,11.812 U3.2
Net-(C29-Pad1): C29.1 U3.3 X2.1 | length 3.3
  F.Cu w0.152: U3.3 276.4,11.712 X2.1 C29.1
Net-(C30-Pad2): C30.2 L5.1 L6.1 | length 2.3
  F.Cu w0.46: L6.1 274,22.413 C30.2
Net-(D3-Pad1): D3.1 U6.5 | length 1.8
  F.Cu w0.152: U6.5 283.31,9.122 D3.1
Net-(F1-Pad2): F1.2 U3.30 | length 1.9
  F.Cu w0.229: U3.30 F1.2@278,21.012
Net-(IC1-Pad2): IC1.2
Net-(IC1-Pad3): IC1.3
Net-(IC1-Pad10): IC1.10
Net-(IC1-Pad11): IC1.11
Net-(IC2-Pad6): IC2.6 J1.1 | length 5
  F.Cu w0.152: IC2.6 296.377,16.112 296.453,16.189 296.453,16.884 296.45,16.887 J1.1
Net-(IC2-Pad7): IC2.7 J1.2 | length 6.9
  F.Cu w0.152: IC2.7 295.725,16.915 295.372,17.268 295.372,21.874 J1.2
Net-(L2-Pad1): L2.1 U2.A1 | length 1.5
  F.Cu w0.152: L2.1 275.203,7.29 U2.A1
Net-(L3-Pad1): L3.1 L4.2 | length 1.5
  F.Cu w0.152: L4.2 271.408,12.52 L3.1
Net-(L4-Pad1): L4.1 U3.47 | length 3.9
  F.Cu w0.152: L4.1 273.2,11.76 273.2,12.472 273.84,13.112 273.84,13.912 274.24,14.312 U3.47
Net-(R5-Pad1): R5.1 U2.D2 | length 4
  F.Cu w0.152: U2.D2 275.62,5.91 276.32,5.21 276.938,5.21 278.42,6.692 R5.1
Net-(R9-Pad1): R9.1 U6.8 | length 1.3
  F.Cu w0.152: R9.1 282.39,7.222 U6.8
Net-(SW1-Pad2): SW1.2
Net-(U3-Pad4): U3.4
Net-(U3-Pad7): U3.7
Net-(U3-Pad8): U3.8
Net-(U3-Pad9): U3.9
Net-(U3-Pad10): U3.10
Net-(U3-Pad20): U3.20
Net-(U3-Pad27): U3.27
Net-(U3-Pad28): U3.28
Net-(U3-Pad29): U3.29
Net-(U3-Pad37): U3.37
Net-(U3-Pad38): U3.38
Net-(U3-Pad39): U3.39
Net-(U3-Pad40): U3.40
Net-(U3-Pad41): U3.41
Net-(U3-Pad42): U3.42
Net-(U3-Pad43): U3.43
Net-(U3-Pad44): U3.44
Net-(U6-Pad7): U6.7
RF: C30.1 F1.4 | length 2
  F.Cu w0.457: C30.1 277.8,22.412 F1.4@278,22.212
SWDCLK: P2.1 U3.25 | length 2.6
  F.Cu w0.152: U3.25 280.92,19.112 281.5,19.692 P2.1
SWDIO: P2.2 U3.26 | length 4.8
  F.Cu w0.152: U3.26 279.6,19.632 280.36,20.392 280.36,21.952 P2.2
VCC: C5.1 SW1.3 U2.A2 U2.B1 U2.C1 | length 15.3
  F.Cu w0.152: U2.C1 U2.B1 274.91,6.562 273.37,6.562 272.975,6.958 272.975,7.622 273.309,7.956 274.775,7.956 275.837,7.956 276.07,7.722 ; U2.A2 276.07,7.722 ; C5.1 276.07,7.722
  F.Cu w0.457: SW1.3 269.242,8.012 269.342,8.112 274.618,8.112 274.775,7.956
VccSwitch: C18.2 D4.1 Q1.3 SW1.1 | length 34.4
  F.Cu w0.152: Q1.3 288.31,8.182 288.86,8.732 D4.1 v1(289.52,9.592) ; C18.2 289.83,6.102 v1(289.86,6.072)
  F.Cu w0.457: SW1.1 272.125,9.012 v1(272.15,8.987)
  B.Cu w0.152: v1(289.52,9.592) 289.86,9.252 v1(289.86,6.072)
  B.Cu w0.457: v1(272.15,8.987) 271.896,8.734 271.896,6.107 273.435,4.567 282.995,4.567 288.274,9.846 289.266,9.846 v1(289.52,9.592)
"": 

## Polygon pours and split planes (outlines as drawn)
DGND on F.Cu "F.Cu-DGND" (solid, remove dead copper, pour order 0): 298.05,2.912 265.85,2.912 265.9,18.112 272.55,18.112 272.55,24.612 298.1,24.612
DGND on B.Cu "B.Cu-DGND" (solid, remove dead copper, pour order 1): 298.1,2.912 265.9,2.912 265.9,18.112 272.55,18.112 272.55,24.612 298.1,24.612

## Keep-outs
Edge.Cuts:
  lines w0.1: 265.9,4.132 265.9,24.592 ; 265.9,4.132 298.1,4.132 ; 265.9,4.132 265.9,24.592 ; 265.9,4.132 298.1,4.132 ; 265.9,24.592 265.9,24.612 ; 265.9,24.592 265.9,24.612 ; 265.9,24.612 298.1,24.612 ; 265.9,24.612 298.1,24.612 ; 298.1,4.132 298.1,24.612 ; 298.1,4.132 298.1,24.612

## Silkscreen, mask and mechanical layers (free items; w line width, h text height)
F.SilkS:
  circle w0.2: c274.63,13.102 r0.403
  circle w0.2: c270.02,10.458 r0.224
  lines w0.15: 283.332,0.4 285.033,0.4 ; 283.933,0 283.933,0.8
  lines w0.2: 277.55,20.972 278.46,20.972 ; 277.98,21.342 277.98,21.412 ; 278,19.582 278,20.582 ; 284.232,0.3 284.332,0.3 ; 284.232,0.4 284.332,0.5 ; 265.9,18.112 272.4,18.112 272.4,24.612 265.9,24.612 265.9,18.112 ; 284.033,0.4 284.432,0 284.432,0.8 284.033,0.4
  lines w0.5: 269.32,22.439 269.9,22.439
  text "I/O" at 279.859,22.975 h0.7 r90
  text "ECG-" at 294.842,22.675 h0.5 r90
  text "CLK" at 279.949,20.43 h0.7 r90
  text "ECG+" at 295.117,20.176 h0.5 r90
  text "nRF52" at 282.325,15.818 h1 r90
  text "GND" at 290.793,8.096 h0.75 r90
  text "GND" at 294.463,7.826 h0.75 r90
  text "5V" at 294.651,5.347 h0.75 r90
  text "BATT+" at 290.847,5.207 h0.6 r90
B.SilkS:
  text "Low Power ECG / Yeo GaTech BNE Lab / 07/18/2019" at 284.503,15.327 h0.76
Dwgs.User:
  text "Todo, separate DGND and AVSS" at 297.354,25.593 h1.5